# EAGLE board Buggy Motor Board (EAGLE 7.2.0)
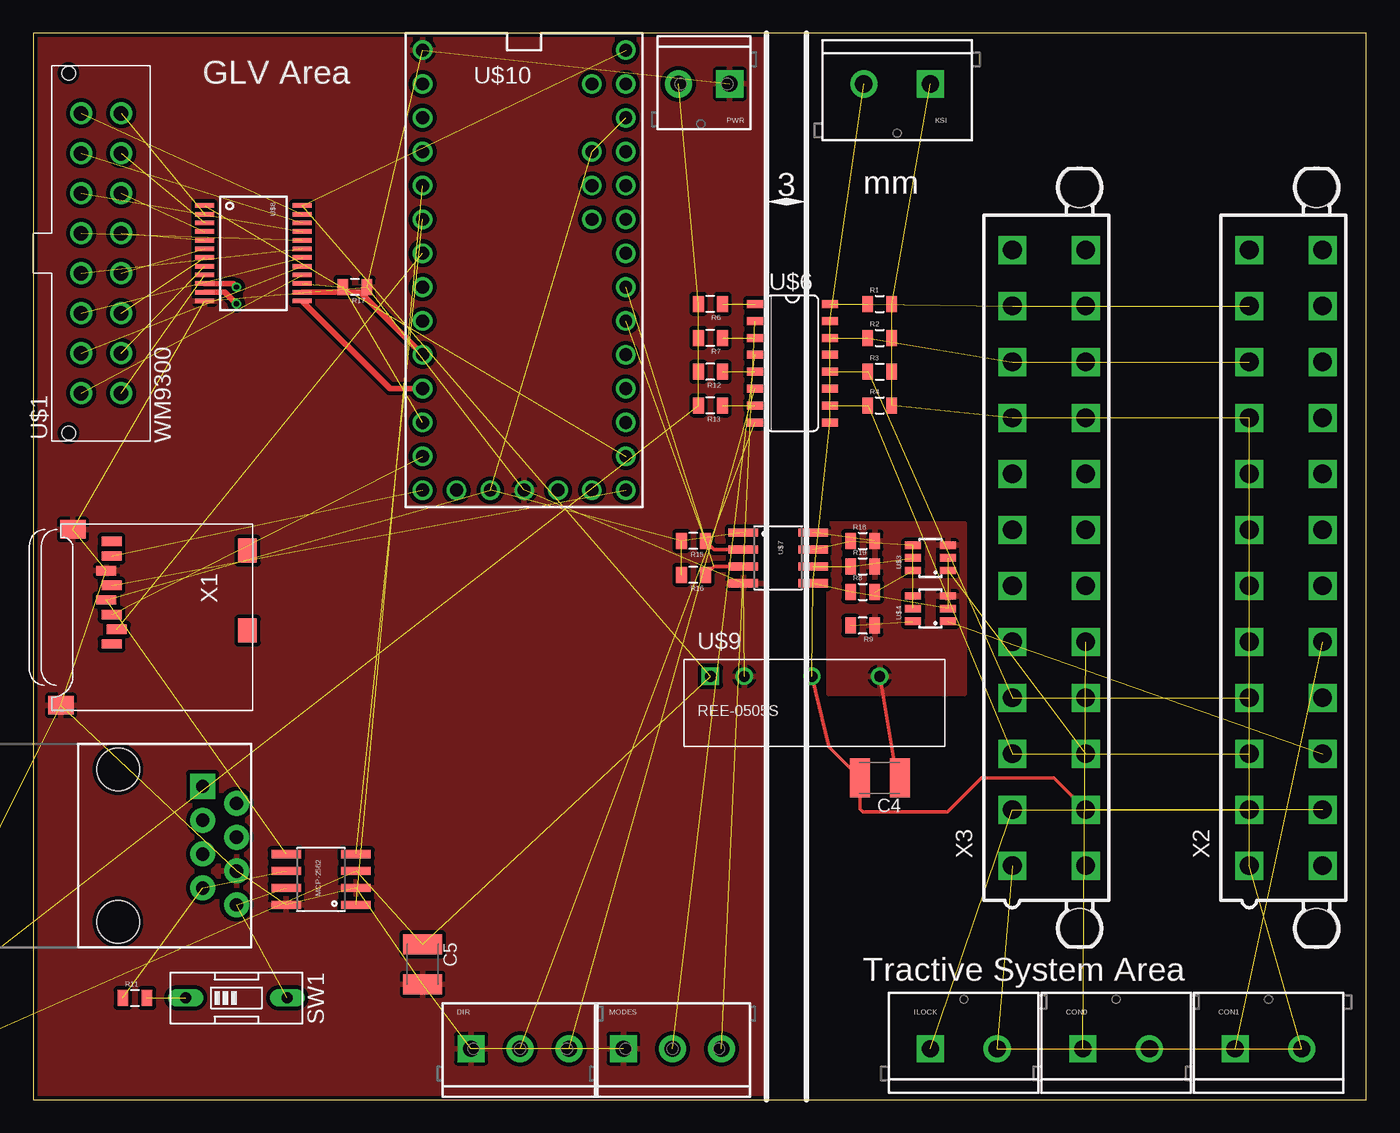
[diagram p0: board, top side]
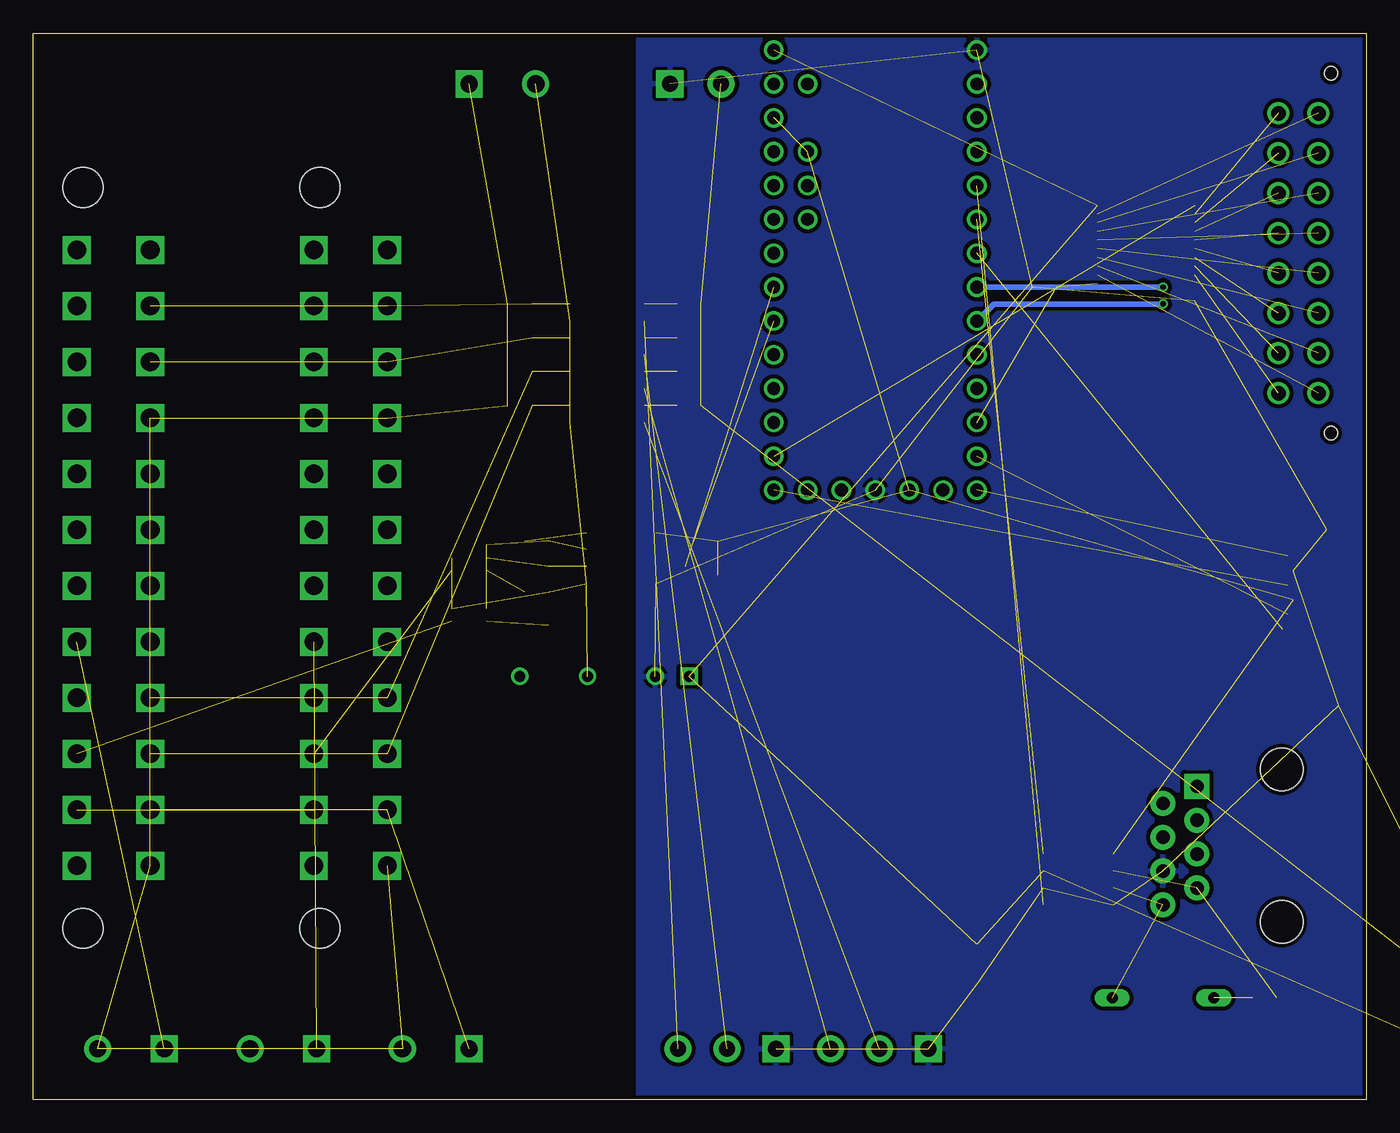
[diagram p1: board, bottom side, seen from below]

Size 100 x 80 mm. Coordinates in mm from the lower left corner, seen from the top.
Outline: 0,0 100,0 100,80 0,80 0,0
Copper layers (1*16): Top 0.035mm / dielectric 1.5mm / Bottom 0.035mm
Design rules "hackvana": minimum track width 6mil, minimum drill 0.3mm, track to track 6mil, track to pad 6mil, pad to pad 6mil, via to via 6mil, smd to smd 0mil, copper to edge 6mil, drill to drill 6mil, minimum pad ring 10mil, minimum via ring 6mil, stop-mask expansion 2mil, vias tented up to drill 100mil, thermal gap 10mil

## Footprints (pad centres in the part's own frame; a part is rotated, then mirrored left to right if it is on the bottom)
C0805 = smd 1.3 x 1.5: 1 -0.95,0; 2 0.95,0
C1210K = smd 1.5 x 2.9: 1 -1.5,0; 2 1.5,0
SCREWTERMINAL-5MM-2 = drill 1.3 pad 2.032 square: 1 0,0 | drill 1.3 pad 2.032: 2 5,0
SCREWTERMINAL-3.5MM-3_LOCK.007S = drill 1.2 pad 2.032 square: 1 -0.178,0 | drill 1.2 pad 2.032: 2 3.5,0; 3 7.178,0
78XXL = drill 1.016 long: GND 0,-3.81; IN -2.54,-3.81; OUT 2.54,-3.81 | hole 3.302: 0,11.176
SO08 = smd 0.61 x 2.21: 1 -1.905,-2.616; 2 -0.635,-2.616; 3 0.635,-2.616; 4 1.905,-2.616; 5 1.905,2.616; 6 0.635,2.616; 7 -0.635,2.616; 8 -1.905,2.616
SCREWTERMINAL-3.5MM-2_LOCK = drill 1.2 pad 2.032 square: 1 -0.178,0 | drill 1.2 pad 2.032: 2 3.678,0
0805 = smd 0.8 x 1.2: 1 -0.9,0; 2 0.9,0
EDG-01 = drill 0.813 long: 1 0,-3.81; 2 0,3.81
WM9300 = drill 1.1: 1 10.5,-1.5; 2 7.5,-1.5; 3 4.5,-1.5; 4 1.5,-1.5; 5 -1.5,-1.5; 6 -4.5,-1.5; 7 -7.5,-1.5; 8 -10.5,-1.5; 9 10.5,1.5; 10 7.5,1.5; 11 4.5,1.5; 12 1.5,1.5; 13 -1.5,1.5; 14 -4.5,1.5; 15 -7.5,1.5; 16 -10.5,1.5 | hole 1.02: -13.5,2.44; 13.5,2.44
SOT23-6-MCP4725 = smd 0.55 x 1.2: 1 -0.95,-1.3; 2 0,-1.3; 3 0.95,-1.3; 4 0.95,1.3; 5 0,1.3; 6 -0.95,1.3
RJ45-8 = drill 1 pad 1.88 square: 1 -4.445,6.35 | drill 1 pad 1.88: 2 -3.175,8.89; 3 -1.905,6.35; 4 -0.635,8.89; 5 0.635,6.35; 6 1.905,8.89; 7 3.175,6.35; 8 4.445,8.89 | hole 3.2: -5.715,0; 5.715,0
16-SOIC = smd 0.6 x 1.2: 1 -4.445,-3; 2 -3.175,-3; 3 -1.905,-3; 4 -0.635,-3; 5 0.635,-3; 6 1.905,-3; 7 3.175,-3; 8 4.445,-3; 9 4.445,2.6; 10 3.175,2.6; 11 1.905,2.6; 12 0.635,2.6; 13 -0.635,2.6; 14 -1.905,2.6; 15 -3.175,2.6; 16 -4.445,2.6
8-SOIC = smd 0.61 x 2.21: 1 -1.905,-2.616; 2 -0.635,-2.616; 3 0.635,-2.616; 4 1.905,-2.616; 5 1.905,2.616; 6 0.635,2.616; 7 -0.635,2.616; 8 -1.905,2.616
SSOP24 = smd 0.348 x 1.397: 1 -3.575,-3.656; 2 -2.925,-3.656; 3 -2.275,-3.656; 4 -1.625,-3.656; 5 -0.975,-3.656; 6 -0.325,-3.656; 7 0.325,-3.656; 8 0.975,-3.656; 9 1.625,-3.656; 10 2.275,-3.656; 11 2.925,-3.656; 12 3.575,-3.656; 13 3.575,3.656; 14 2.925,3.656; 15 2.275,3.656; 16 1.625,3.656; 17 0.975,3.656; 18 0.325,3.656; 19 -0.325,3.656; 20 -0.975,3.656; 21 -1.625,3.656; 22 -2.275,3.656; 23 -2.925,3.656; 24 -3.575,3.656
REE-0505S = drill 0.8 square: 1 0,0 | drill 0.8: 2 2.54,0; 4 7.62,0; 6 12.7,0
TEENSY_3.1+4 = drill 0.965: 0 -7.62,15.24; 1 -7.62,12.7; 2 -7.62,10.16; 3 -7.62,7.62; 3.3V 7.62,12.7; 3.3V1 -2.54,-15.24; 4 -7.62,5.08; 5 -7.62,2.54; 6 -7.62,0; 7 -7.62,-2.54; 8 -7.62,-5.08; 9 -7.62,-7.62; 10 -7.62,-10.16; 11 -7.62,-12.7; 12 -7.62,-15.24; 13 7.62,-15.24; 14/A0 7.62,-12.7; 15/A1 7.62,-10.16; 16/A2 7.62,-7.62; 17/A3 7.62,-5.08; 18/A4 7.62,-2.54; 19/A5 7.62,0; 20/A6 7.62,2.54; 21/A7 7.62,5.08; 22/A8 7.62,7.62; 23/A9 7.62,10.16; A10 5.08,7.62; A11 5.08,5.08; A14 5.08,-15.24; AGND 7.62,15.24; AREF 5.08,10.16; GND -7.62,17.78; GND1 0,-15.24; PGM 2.54,-15.24; VBAT -5.08,-15.24; VIN 7.62,17.78; VUSB 5.08,15.24
MICROSD = smd 0.7 x 1.5: 1 9,-10.64; 2 7.9,-10.24; 3 6.8,-10.64; 4 5.7,-11.04; 5 4.6,-10.64; 6 3.5,-11.04; 7 2.4,-10.64; 8 1.3,-10.64 | smd 1.8 x 1.4: CD1 2,-0.44; CD2 8,-0.44 | smd 1.4 x 1.9: MT1 0.4,-13.54; MT2 13.6,-14.44
5566-24 = drill 1.4 square: 1 23.1,-2.75; 2 18.9,-2.75; 3 14.7,-2.75; 4 10.5,-2.75; 5 6.3,-2.75; 6 2.1,-2.75; 7 -2.1,-2.75; 8 -6.3,-2.75; 9 -10.5,-2.75; 10 -14.7,-2.75; 11 -18.9,-2.75; 12 -23.1,-2.75; 13 23.1,2.75; 14 18.9,2.75; 15 14.7,2.75; 16 10.5,2.75; 17 6.3,2.75; 18 2.1,2.75; 19 -2.1,2.75; 20 -6.3,2.75; 21 -10.5,2.75; 22 -14.7,2.75; 23 -18.9,2.75; 24 -23.1,2.75 | hole 3: 27.8,2.29; -27.8,2.29

## Placement (x,y rotation side)
C1  .33uF  [C0805]  -13.97,-3.81 0 top  (outside the outline)
C4  [C1210K]  63.5,24.13 180 top
C5  [C1210K]  29.21,10.16 270 top
C6  .1uF  [C0805]  -13.97,-8.89 0 top  (outside the outline)
CON0  M025MM  [SCREWTERMINAL-5MM-2]  78.74,3.81 0 top
CON1  M025MM  [SCREWTERMINAL-5MM-2]  90.17,3.81 0 top
DIR  [SCREWTERMINAL-3.5MM-3_LOCK.007S]  33.02,3.81 0 top
IC1  [78XXL]  -11.43,6.35 0 top  (outside the outline)
ILOCK  M025MM  [SCREWTERMINAL-5MM-2]  67.31,3.81 0 top
KSI  M025MM  [SCREWTERMINAL-5MM-2]  67.31,76.2 180 top
MCP-2562  MCP2562  [SO08]  21.59,16.51 90 top
MODES  [SCREWTERMINAL-3.5MM-3_LOCK.007S]  44.45,3.81 0 top
PWR  M023.5MM_LOCK  [SCREWTERMINAL-3.5MM-2_LOCK]  52.07,76.2 180 top
R1  [0805]  63.5,59.69 0 top
R2  [0805]  63.5,57.15 0 top
R3  [0805]  63.5,54.61 0 top
R4  10k  [0805]  63.5,52.07 0 top
R6  10k  [0805]  50.8,59.69 180 top
R7  10k  [0805]  50.8,57.15 180 top
R8  [0805]  62.23,38.1 0 top
R9  [0805]  62.23,35.56 180 top
R11  120  [0805]  7.62,7.62 0 top
R12  10k  [0805]  50.8,54.61 180 top
R13  10k  [0805]  50.8,52.07 180 top
R15  4.7k  [0805]  49.53,41.91 180 top
R16  4.7k  [0805]  49.53,39.37 180 top
R17  [0805]  24.13,60.96 180 top
R18  4.7k  [0805]  62.23,41.91 0 top
R19  4.7k  [0805]  62.23,40.01 0 top
SW1  [EDG-01]  15.24,7.62 270 top
U$1  WM9300  [WM9300]  5.08,63.5 90 top
U$3  DAC_MCP4725SOT-CP  [SOT23-6-MCP4725]  67.31,40.64 90 top
U$4  DAC_MCP4725SOT-CP  [SOT23-6-MCP4725]  67.31,36.83 90 top
U$5  RJ45-8PTH  [RJ45-8]  6.35,19.05 270 top
U$6  PS2801C-4  [16-SOIC]  57.15,55.24 270 top
U$7  ADUM1251  [8-SOIC]  55.88,40.64 270 top
U$8  MUX-74HC4067SMD  [SSOP24]  16.51,63.5 270 top
U$9  REE-0505S  [REE-0505S]  50.8,31.75 0 top
U$10  TEENSY_3.1+4  [TEENSY_3.1+4]  36.83,60.96 0 top
X1  MICROSD  [MICROSD]  16.51,43.18 270 top
X2  5566-24  [5566-24]  93.98,40.64 270 top
X3  5566-24  [5566-24]  76.2,40.64 270 top

## Library data of the parts
C1 C4-C6 = rcl
CON0 CON1 DIR ILOCK KSI MODES PWR U$5 = SparkFun-Connectors
IC1 = SparkFun-PowerIC
MCP-2562 U$7 = Wetmelon-DigitalIC
R1-R4 R6-R9 R11-R13 R15-R19 = SparkFun-Resistors
SW1 = special
U$1 = Wetmelon-Connectors
U$3 U$4 U$8 = SparkFun-AnalogIC
U$6 = Wetmelon-DiscreteSemi
U$9 = Wetmelon-PowerIC
U$10 = Teensy_3_Series_Board_v1.0
X1 = adafruit
X2 X3 = con-molex; OC_FARNELL: unknown; OC_NEWARK: unknown

## Nets
+3V3: MCP-2562.5 R15.2 R16.2 U$7.1 U$10.3.3V U$10.3.3V1 U$10.AREF X1.4
+5V: C5.1 C6.1 IC1.OUT MCP-2562.3 U$8.24 U$9.1 U$10.VIN
+5V/1: C4.1 R9.1 R18.2 R19.2 U$3.3 U$4.3 U$7.8 U$9.6
+12V: C1.1 IC1.IN PWR.2 R6.2 R7.2 R12.2 R13.2
AGND: U$10.AGND
AMUX0: U$8.10 U$10.6
AMUX1: U$8.11 U$10.7
AMUX2: U$8.14 U$10.8
AMUX3: U$8.13 U$10.9
AMUX_EN: R17.2 U$8.15 U$10.10
AMUX_IN: U$8.1 U$10.14/A0
CANH: MCP-2562.7 SW1.2 U$5.8
CANL: MCP-2562.6 R11.1 U$5.7
CD: X1.CD1
CHAN0: U$1.8 U$8.9
CHAN1: U$1.7 U$8.8
CHAN2: U$1.6 U$8.7
CHAN3: U$1.5 U$8.6
CHAN4: U$1.4 U$8.5
CHAN5: U$1.3 U$8.4
CHAN6: U$1.2 U$8.3
CHAN7: U$1.1 U$8.2
CHAN8: U$1.9 U$8.23
CHAN9: U$1.10 U$8.22
CHAN10: U$1.11 U$8.21
CHAN11: U$1.12 U$8.20
CHAN12: U$1.13 U$8.19
CHAN13: U$1.14 U$8.18
CHAN14: U$1.15 U$8.17
CHAN15: U$1.16 U$8.16
CON0: CON0.1 X3.17
CON1: CON1.1 X2.17
DAC0: U$3.1 X3.15
DAC1: U$4.1 X2.15
ENC_0_A: U$10.15/A1
ENC_0_B: U$10.16/A2
ENC_0_Z: U$10.17/A3
ENC_1_A: U$10.20/A6
ENC_1_B: U$10.21/A7
ENC_1_Z: U$10.22/A8
FWD: R2.1 U$6.14 X2.10 X3.10
GND: C1.2 C5.2 C6.2 DIR.1 IC1.GND MCP-2562.2 MCP-2562.8 MODES.1 PWR.1 R17.1 U$5.6 U$7.4 U$8.12 U$9.2 U$10.GND U$10.GND1 X1.6 X1.MT1 X1.MT2
GND1: C4.2 KSI.2 R8.1 U$3.2 U$4.2 U$6.9 U$6.11 U$6.13 U$6.15 U$7.5 U$9.4 X2.14 X3.14
ILOCK: ILOCK.1 X2.2 X3.2
KSI: CON0.2 CON1.2 ILOCK.2 KSI.1 R1.2 R2.2 R3.2 R4.2 X2.1 X2.9 X3.1 X3.9
MISO: U$10.12 X1.7
MODE0: R4.1 U$6.10 X2.3 X3.3
MODE1: R3.1 U$6.12 X2.4 X3.4
MOSI: U$10.11 X1.3
N$7: R8.2 U$3.6
N$8: R9.2 U$4.6
N$12: R6.1 U$6.1
N$13: R11.2 SW1.1
N$15: R7.1 U$6.3
N$27: R12.1 U$6.5
N$29: R13.1 U$6.7
OPTO0: MODES.3 U$6.2
OPTO1: MODES.2 U$6.4
OPTO2: DIR.3 U$6.6
OPTO3: DIR.2 U$6.8
REV: R1.1 U$6.16 X2.11 X3.11
RXCAN: MCP-2562.4 U$10.4
SCK: U$10.13 X1.5
SCL: R16.1 U$7.3 U$10.19/A5
SCL2: R19.1 U$3.5 U$4.5 U$7.6
SD_CS: U$10.5 X1.2
SDA: R15.1 U$7.2 U$10.18/A4
SDA2: R18.1 U$3.4 U$4.4 U$7.7
TXCAN: MCP-2562.1 U$10.3
VBAT: U$10.VBAT
VUSB: U$10.VUSB

## Tracks (layer width: path | path; a pad name or v marks a point on that pad's centre or on a via)
+3V3  (7 unrouted)
+5V  (6 unrouted)
+5V/1  (1 unrouted)
  Top 0.254: U$9.6 64.77,24.36 C4.1
  pour Top (isolate 0.305, rank 6): 59.69,43.18 69.85,43.18 69.85,30.48 59.69,30.48
+12V  (6 unrouted)
AMUX0  (via drill 0.4)
  Top 0.406: v15.24,60.96 14.97,61.23 U$8.10
  Bottom 0.406: U$10.6 v15.24,60.96
AMUX1  (via drill 0.4)
  Top 0.406: U$8.11 14.36,60.58 v15.24,59.69
  Bottom 0.406: v15.24,59.69 27.94,59.69 U$10.7
AMUX2
  Top 0.406: U$10.8 24.52,60.58 U$8.14
AMUX3
  Top 0.406: U$8.13 26.75,53.34 U$10.9
AMUX_EN  (2 unrouted)
AMUX_IN  (1 unrouted)
CANH  (2 unrouted)
CANL  (2 unrouted)
CHAN0  (1 unrouted)
CHAN1  (1 unrouted)
CHAN2  (1 unrouted)
CHAN3  (1 unrouted)
CHAN4  (1 unrouted)
CHAN5  (1 unrouted)
CHAN6  (1 unrouted)
CHAN7  (1 unrouted)
CHAN8  (1 unrouted)
CHAN9  (1 unrouted)
CHAN10  (1 unrouted)
CHAN11  (1 unrouted)
CHAN12  (1 unrouted)
CHAN13  (1 unrouted)
CHAN14  (1 unrouted)
CHAN15  (1 unrouted)
CON0  (1 unrouted)
CON1  (1 unrouted)
DAC0  (1 unrouted)
DAC1  (1 unrouted)
FWD  (3 unrouted)
GND  (18 unrouted)
  pour Bottom (isolate 0.305, rank 6): 0,80.01 54.61,80.01 54.61,0 0,0
  pour Top (isolate 0.305, rank 6): 0,80.01 54.61,80.01 54.61,0 0,0
GND1  (10 unrouted)
  Top 0.254: U$9.4 59.69,26.44 C4.2 62,21.82 62.23,21.59 68.58,21.59 71.12,24.13 76.56,24.13 X3.14
ILOCK  (2 unrouted)
KSI  (11 unrouted)
MISO  (1 unrouted)
MODE0  (3 unrouted)
MODE1  (3 unrouted)
MOSI  (1 unrouted)
N$7  (1 unrouted)
N$8  (1 unrouted)
N$12  (1 unrouted)
N$13  (1 unrouted)
N$15  (1 unrouted)
N$27  (1 unrouted)
N$29  (1 unrouted)
OPTO0  (1 unrouted)
OPTO1  (1 unrouted)
OPTO2  (1 unrouted)
OPTO3  (1 unrouted)
REV  (3 unrouted)
RXCAN  (1 unrouted)
SCK  (1 unrouted)
SCL  (1 unrouted)
  Top 0.254: U$7.3 51.06,40.01 R16.1
SCL2  (3 unrouted)
SD_CS  (1 unrouted)
SDA  (1 unrouted)
  Top 0.254: U$7.2 51.06,41.27 R15.1
SDA2  (3 unrouted)
TXCAN  (1 unrouted)

## Text on the board
tPlace: GLV Area | mm | Tractive System Area
tDocu: Warning! | High Voltage!